# Altium PCB STM32F103C8T6.PcbDoc
Units mm, origin at the board's own origin, x right, y up, seen from the top; angles counter-clockwise.
Board outline 22.86 x 53.34 mm, 2 copper layers (Top Layer, Bottom Layer); 36 components, 51 nets, 172 pads, 50 vias.
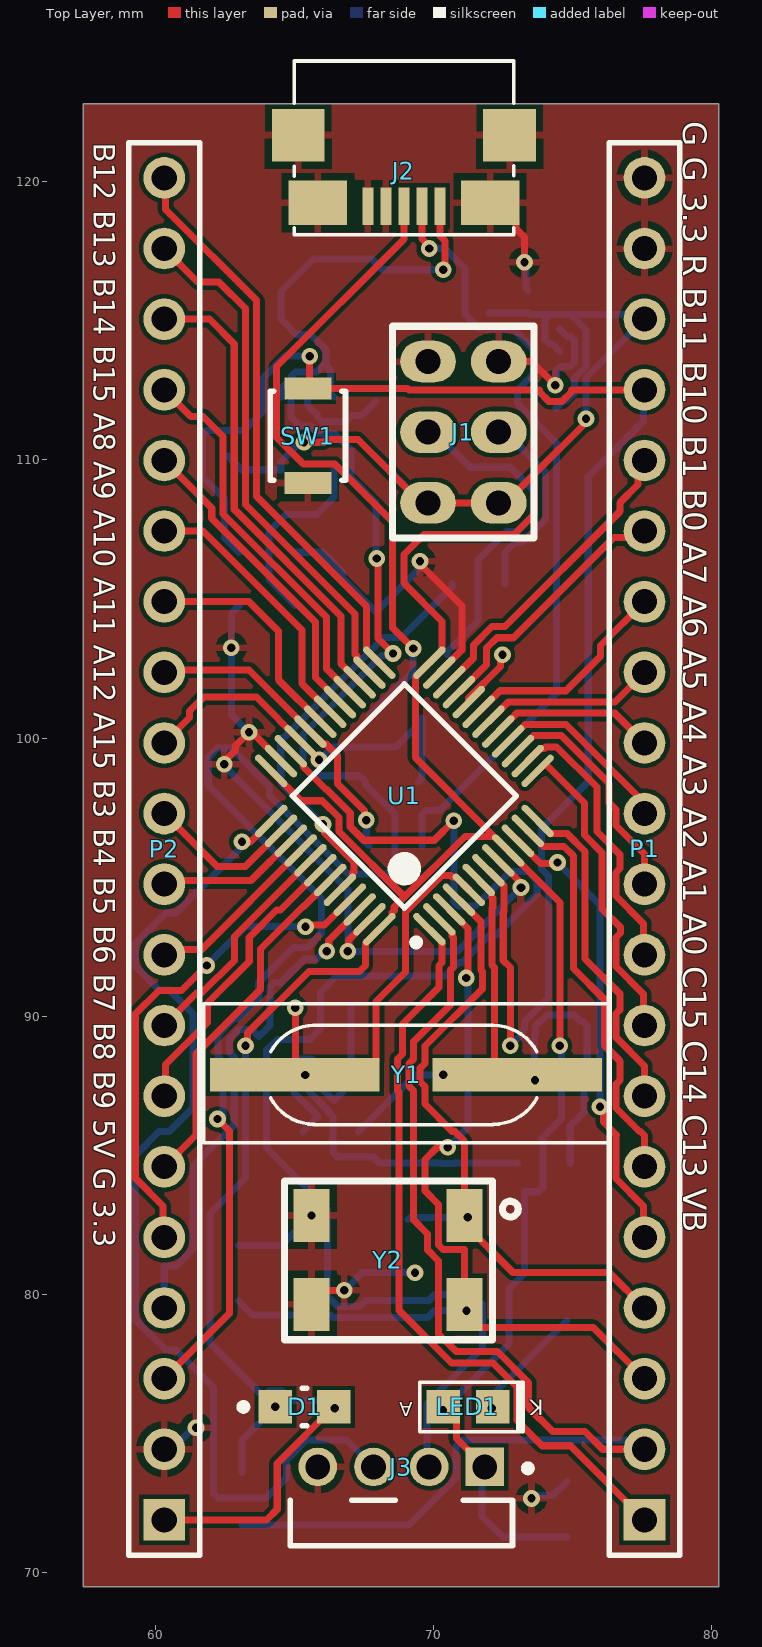
[diagram p0: Top Layer view]
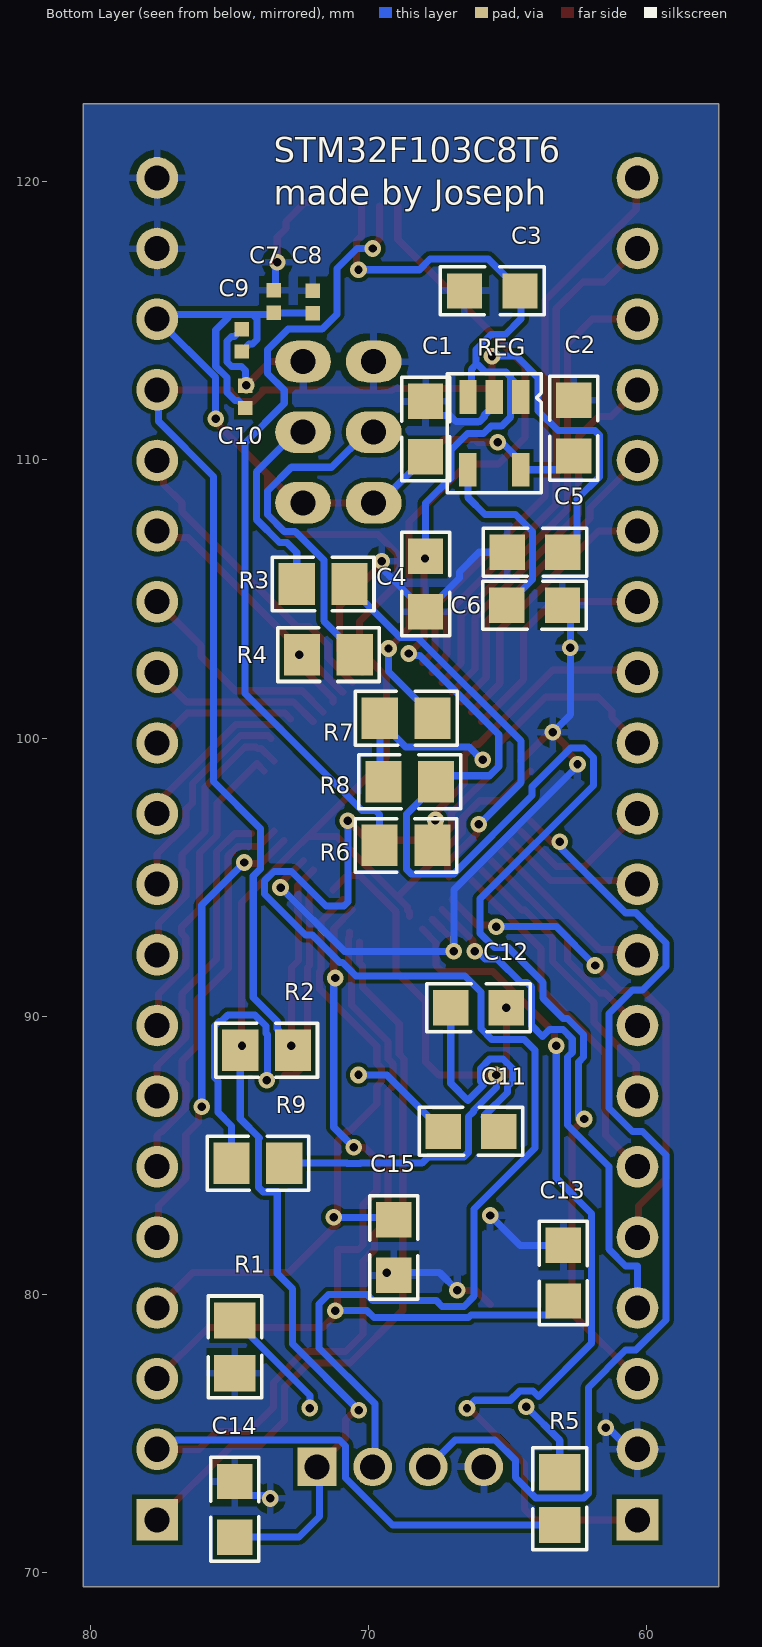
[diagram p1: Bottom Layer view, seen from below]
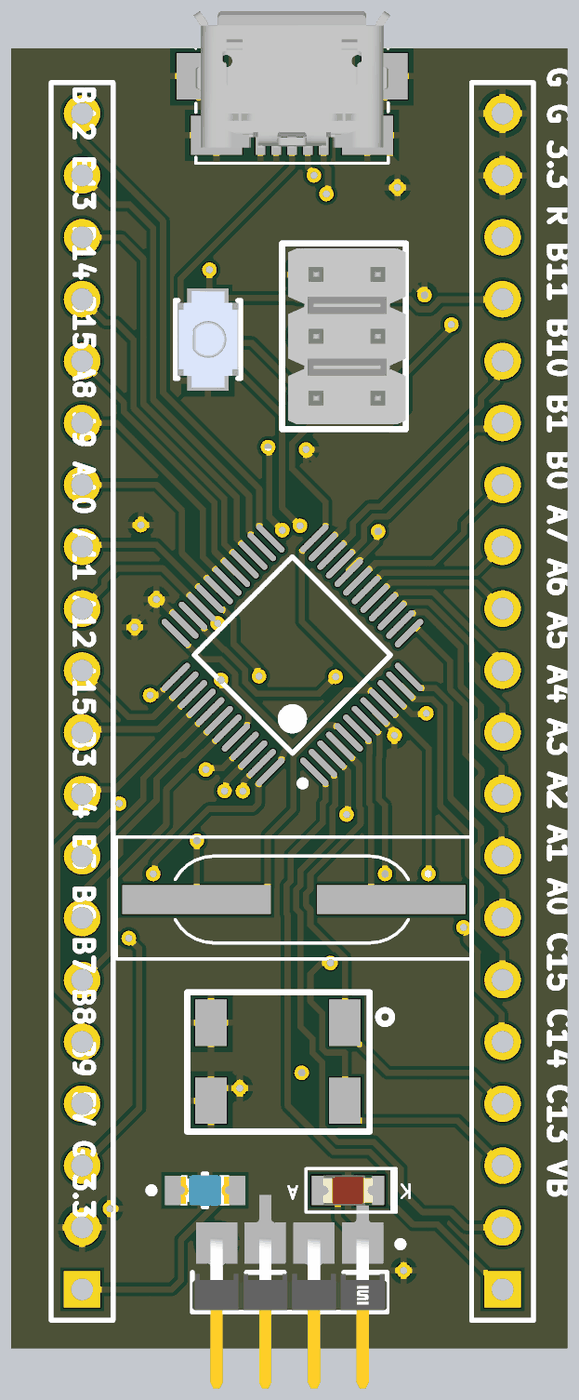
[diagram p2: 3D render of the assembled board from above, using the file's embedded part models]
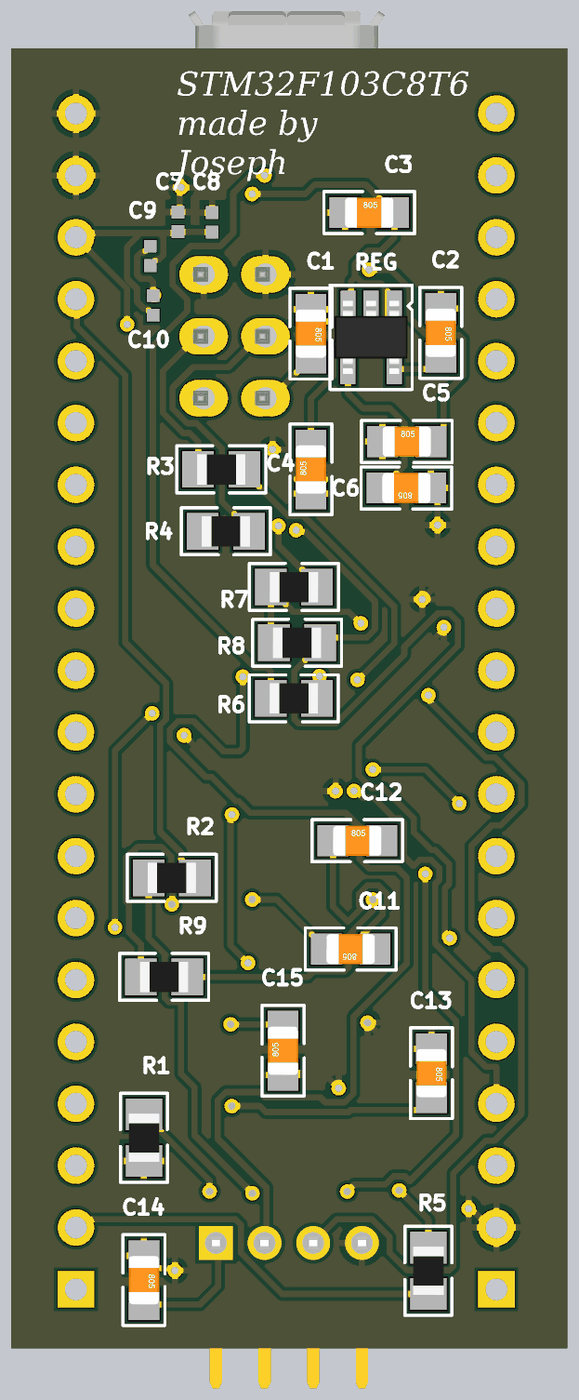
[diagram p3: 3D render of the assembled board from below, using the file's embedded part models]

## Layer stack, top to bottom
Top Solder: solder mask 0.0102, Solder Resist, Dk 3.5
Top Layer: signal copper 0.0356
Dielectric 1: dielectric 0.32, FR-4, Dk 4.8
Bottom Layer: signal copper 0.0356
Bottom Solder: solder mask 0.0102, Solder Resist, Dk 3.5

## Board outline
57.404,69.469 57.404,122.809 80.264,122.809 80.264,69.469

## Design rules (kind name [scope] priority, off if disabled: settings)
Clearance [All] p1: gap=0.15 ignorepadtopadclearanceinfootprint=FALSE
HoleToHoleClearance [All] p1: gap=0 allowstackedmicrovias=TRUE
MinimumSolderMaskSliver [All] p1: minsoldermaskwidth=0
PolygonConnect [All] p1: connectstyle=Relief reliefconductorwidth=0.254 reliefentries=4 polygonreliefangle="90 Angle" airgapwidth=0.254
RoutingVias [All] p1: holewidth=0.3 width=0.6 viastyle="Through Hole" minholewidth=0.25 minwidth=0.55 maxholewidth=0.4 maxwidth=0.8
SilkToSilkClearance [All] p1: silktosilkclearance=0
SilkToSolderMaskClearance [IsPad] p1: minsilkscreentomaskgap=0 clearancetoexposedcopper=TRUE
SolderMaskExpansion [All] p1: expansion=0.05 istentingtop=FALSE
Width Width_4 [All] p1: maxlimit=0.254 minlimit=0.2 preferedwidth=0.254
Width Width_3 [InNet('NetJ2_3')] p2: maxlimit=0.3 minlimit=0.2 preferedwidth=0.254
Width Width_2 [InNet('NetJ2_2')] p3: maxlimit=0.3 minlimit=0.2 preferedwidth=0.254
Width Width_1 [InNet('VCC3.3')] p4: maxlimit=0.6 minlimit=0.254 preferedwidth=0.4
Width [InNet('+5')] p5: maxlimit=0.8 minlimit=0.254 preferedwidth=0.6
26 further rules are at their usual default settings.

## Components (designator, comment, footprint, x,y, rotation, side; value= is the part's Value field where it differs from the comment)
C1 "10uF" CAP_0805 67.945,111.109 r270 bottom
C2 "10uF" CAP_0805 62.611,111.141 r270 bottom
C3 "1uF" CAP_0805 65.548,116.078 r180 bottom
C4 "1uF" CAP_0805 67.945,105.537 r90 bottom
C5 "1uF" CAP_0805 64.008,106.68 r180 bottom
C6 "22pF" CAP_0805 64.024,104.775 r0 bottom
C7 "0.1u" CAPC0402(1005)60_L 72.009,115.678 r270 bottom
C8 "0.1u" CAPC0402(1005)60_L 73.406,115.697 r270 bottom
C9 "0.1u" CAPC0402(1005)60_L 74.549,114.3 r270 bottom
C10 "0.1u" CAPC0402(1005)60_L 74.422,112.268 r270 bottom
C11 "22pF" CAP_0805 66.31,85.852 r0 bottom
C12 "22pF" CAP_0805 66.04,90.297 r180 bottom
C13 "0.1uF" CAP_0805 62.992,80.756 r270 bottom
C14 "0.1uF" CAP_0805 74.803,72.263 r270 bottom
C15 "0.1uF" CAP_0805 69.088,81.677 r90 bottom
D1 "LED BLUE" FP-APHCM2012QBC-D-F01-MFG 65.371,75.946 r0 top
J1 "2X3 Berg Strip" CON6_100_59D78_TH_ST_Duplicate 72.351,108.458 r90 top
J2 "MICRO USB2.0" CON_10118192-0001LF_SMD 68.946,120.401 r180 top
J3 "TMM-104-01-L-S-RA" FP-TMM-104-01-L-S-RA-MFG 68.85,71.768 r0 top
LED1 "RED LED" LED_0805 71.247,75.946 r180 top
P1 "Header 20" HDR1X20 77.597,71.882 r90 top
P2 "Header 20" HDR1X20 60.325,71.882 r90 top
R1 "1.5K" RES_0805 74.803,78.105 r90 bottom
R2 "10K" RES_0805 73.66,88.773 r180 bottom
R3 "100K" RES_0805 71.628,105.537 r180 bottom
R4 "100K" RES_0805 71.44,102.997 r180 bottom
R5 "1.5K" RES_0805 63.119,72.644 r90 bottom
R6 "20" RES_0805 68.646,96.139 r0 bottom
R7 "20" RES_0805 68.641,100.711 r180 bottom
R8 "1.5K" RES_0805 68.514,98.425 r180 bottom
R9 "10Mohm" RES_0805 73.975,84.709 r180 bottom
REG "RT9193-33GB" SOT23-5 65.474,110.958 r0 bottom (schematic designator REG1)
SW1 "B3U-1000P" FP-B3U-1000P-MFG 65.493,110.871 r90 top
U1 "STM32F103C8T6" STM-LQFP48_L 68.961,97.917 r135 top
Y1 "8MHz" XTAL_314_240X47_SMD 65.025,87.884 r0 top
Y2 "32.768KHz" "XTAL_MC-405 32.7680K-G3" 71.12,79.629 r180 top

## Footprints (in the part's own frame and the unit in brackets; to place one, negate y for a bottom-side part, rotate by r counter-clockwise, add the part's x,y. Pads: shape width x height; smd on the part's side, far side on the other; paste and mask are expansions set on the pad)
CAP_0805 [mm] "Ceramic Capacitor"
  rect 1.27x1.27 smd mask+0.076: 1(-1,0) 2(1,0)
  silkscreen extent -1.86,-0.86 1.86,0.86, body extent -1,-0.62 1,0.63, height 0.78
CAPC0402(1005)60_L [mm] "Chip Capacitor, Body 1.0x0.5mm, Height 0.6mm, IPC High Density"
  rect 0.52x0.52 smd: 1(-0.4,0) 2(0.4,0)
  body extent -0.55,-0.3 0.55,0.3, height 0.6
CON6_100_59D78_TH_ST_Duplicate [mm] "Berg strip"
  oval 1.5x2 hole 0.9: 1(0,0) 2(0,2.54) 3(2.54,0) 4(2.54,2.54) 5(5.08,0) 6(5.08,2.54)
  silkscreen extent -1.27,-1.27 6.35,3.81, body extent -1.07,-1.27 6.15,3.56, height 8.18
CON_10118192-0001LF_SMD [mm] "USB2.0 MICRO"
  rect 0.4x1.35 smd: 1(-1.3,1.275) 2(-0.65,1.275) 3(0,1.275) 4(0.65,1.275) 5(1.3,1.275)
  rect 2.1x1.6 smd: 6(-3.1,1.15) 7(3.1,1.15)
  rect 1.9x1.9 smd: 8(-3.8,-1.275) 9(3.8,-1.275)
  silkscreen extent -3.95,-3.94 3.95,2.3, body extent -4.04,-3.94 4.04,1.66, height 2.81
FP-APHCM2012QBC-D-F01-MFG [mm]
  rect 1.2x1.2 smd paste+0 mask+0: 1(-1.05,0) 2(1.05,0)
  silkscreen extent -2.32,-0.67 0.08,0.67, body extent -1.75,-0.77 1.75,0.77, height 0.25
FP-B3U-1000P-MFG [mm]
  rect 0.8x1.7 smd paste+0 mask+0: 1(-1.7,0) 2(1.7,0)
  silkscreen extent -1.6,-1.35 1.6,1.35, body extent -2.2,-1.45 2.2,1.45, height 0.25
FP-TMM-104-01-L-S-RA-MFG [mm]
  rect 1.39x1.39 hole 0.89 paste-1000 mask+0: 1(3,2.019)
  round 1.39 hole 0.89 paste-1000 mask+0: 2(1,2.019) 3(-1,2.019) 4(-3,2.019)
  silkscreen extent -4,-0.81 4.68,2.09, body extent -4.1,-4.24 4.1,4.09, height 0.25
HDR1X20 [mm] "Connector; Header; 20 Position"
  rect 1.5x1.5 hole 0.9: 1(0,0)
  round 1.5 hole 0.9: 2(2.54,0) 3(5.08,0) 4(7.62,0) 5(10.16,0) 6(12.7,0) 7(15.24,0) 8(17.78,0) 9(20.32,0) 10(22.86,0) 11(25.4,0) 12(27.94,0) 13(30.48,0) 14(33.02,0) 15(35.56,0) 16(38.1,0) 17(40.64,0) 18(43.18,0) 19(45.72,0) 20(48.26,0)
  silkscreen extent -1.27,-1.27 49.53,1.27
LED_0805 [mm] "LED"
  rect 1.2x1.2 smd mask+0.076: A(0.889,0) K(-0.889,0)
  silkscreen extent -1.99,-0.89 1.73,0.89, body extent -1.01,-0.62 1.01,0.63, height 1.1
RES_0805 [mm] "Resister"
  rect 1.3x1.5 smd mask+0.076: 1(0.95,0) 2(-0.95,0)
  silkscreen extent -1.83,-0.97 1.83,0.97, body extent -1,-0.63 1,0.62, height 0.5
SOT23-5 [mm] "CASE: SOT"
  rect 0.62x1.22 smd mask+0.076: 1(-0.953,-1.31) 2(-0.003,-1.31) 3(0.947,-1.31) 4(0.952,1.31) 5(-0.953,1.31)
  silkscreen extent -1.69,-2.14 1.69,2.14, body extent -1.5,-1.5 1.5,1.5, height 1.41
STM-LQFP48_L [mm] "QFP, 48-Leads, Body 7x7mm, Pitch 0.5mm, IPC High Density"
  oval 1.55x0.25 smd: 1(-4.025,2.75) 2(-4.025,2.25) 3(-4.025,1.75) 4(-4.025,1.25) 5(-4.025,0.75) 6(-4.025,0.25) 7(-4.025,-0.25) 8(-4.025,-0.75) 9(-4.025,-1.25) 10(-4.025,-1.75) 11(-4.025,-2.25) 12(-4.025,-2.75) 25(4.025,-2.75) 26(4.025,-2.25) 27(4.025,-1.75) 28(4.025,-1.25) 29(4.025,-0.75) 30(4.025,-0.25) 31(4.025,0.25) 32(4.025,0.75) 33(4.025,1.25) 34(4.025,1.75) 35(4.025,2.25) 36(4.025,2.75)
  oval 0.25x1.55 smd: 13(-2.75,-4.025) 14(-2.25,-4.025) 15(-1.75,-4.025) 16(-1.25,-4.025) 17(-0.75,-4.025) 18(-0.25,-4.025) 19(0.25,-4.025) 20(0.75,-4.025) 21(1.25,-4.025) 22(1.75,-4.025) 23(2.25,-4.025) 24(2.75,-4.025) 37(2.75,4.025) 38(2.25,4.025) 39(1.75,4.025) 40(1.25,4.025) 41(0.75,4.025) 42(0.25,4.025) 43(-0.25,4.025) 44(-0.75,4.025) 45(-1.25,4.025) 46(-1.75,4.025) 47(-2.25,4.025) 48(-2.75,4.025)
  silkscreen extent -4.15,-2.85 2.85,3.55, body extent -3.5,-3.5 3.5,3.5, height 1.6
XTAL_314_240X47_SMD [mm] "CASE: TH"
  rect 6.096x1.2 smd: 1(0,0) 2(8,0)
  silkscreen extent -3.29,-2.44 11.32,2.57, body extent -2.99,-2.27 10.9,2.41, height 3.05
"XTAL_MC-405 32.7680K-G3" [mm] "Crystal"
  rect 1.3x1.9 smd: 1(0,-3.2) 2(5.5,-3.2) 3(5.5,0) 4(0,0)
  silkscreen extent -1.93,-4.44 6.48,1.27, body extent -1.02,-4.44 6.48,1.27, height 3.6

## Part data
C1 C2 C3 C4 C5: library part CAP_1uF-50V-5%-0805, "1µF ±5% 50V Ceramic Capacitor X7R 0805 (2012 Metric)", Case/Package="0805 (2012 Metric)", Manufacturer=Yageo, Manufacturing Part Number=CC0805JKX7R9BB105, Supplier Part Number-1=311-3498-1-ND, Supplier-1=Digikey
C6 C11 C12: library part CAP_22pF-50V-5%-0805, "22pF ±5% 50V Ceramic Capacitor C0G, NP0 0805 (2012 Metric)", Case/Package=0805, Manufacturer=KEMET, Manufacturer Part Number=C0805C220J5GACTU, Supplier Part Number-1=399-1113-1-ND, Supplier-1=Digikey
C7 C8 C9 C10: library part CMP-1034-02112-1, "CAP 1uF 4V ±20% 0402 (1005 Metric) Thickness 0.6mm SMD", Case-EIA=0402, Case-Metric=1005, Rated Voltage="4 V", Tolerance=Â±20%, Max Thickness="0.6 mm", Technology=SMT
C13 C14 C15: library part CAP_0.1uF-50V-5%-0805, "0.1µF ±5% 50V Ceramic Capacitor X7R 0805 (2012 Metric)", Case/Package="0805 (2012 Metric)", Manufacturer=KEMET, Manufacturing Part Number=C0805C104J5RACTU, Supplier Part Number-1=399-1171-1-ND, Supplier-1=Digikey
D1: library part CMP-44529-000061-1, "LED BLUE CLEAR CHIP SMD", Case Code (Imperial)=0805, Case Code (Metric)=2012, Color=Blue, Forward Current=20mA, Forward Voltage=3.3V, Lens Color=Colorless, Max Operating Temperature=85°C, Min Operating Temperature=-40°C, Package Quantity=2000, Case/Package=0805, Dominant Wavelength=465nm, Height=0.4mm, Illumination Color=Blue, Lead Free="Lead Free", Length=2mm, Lens Style=Clear, Lens Transparency=Clear, Luminous Intensity=100mcd, Mount="Surface Mount", Number of LEDs=1, Number of Pins=2, Packaging="Tape and Reel", RoHS Compliant=Yes, Series=-, Test Current=20mA, Viewing Angle=110°, Width=1.25mm
J1: library part CON-BS-PLG_2X3-100-TH-ST, "6 pin, 2 row, 2.54mm pitch bergstrip", Case/Package=TH, Manufacturer=NA, Manufacturer Part Number=NA, Supplier Part Number-1=NA, Supplier-1=NA
J2: library part CON-USB_10118192-0002LF-SMD, "USB - micro B USB 2.0 Receptacle Connector 5 Position Surface Mount, Right Angle", Case/Package=SMD, Manufacturer="Amphenol ICC (FCI)", Manufacturing Part Number=10118192-0002LF, Supplier Part Number-1=609-5379-1-ND, Supplier-1=Digikey
J3: library part CMP-02766-001710-1, "CONN HEADER R/A 4POS 2MM", Housing Color=Black, Max Current Rating=3.9A, Max Operating Temperature=125°C, Max Voltage Rating (AC)=500V, Min Operating Temperature=-55°C, Contact Material=Bronze, Contact Plating=Gold, Depth=5.97mm, Gender=Male, Housing Material=Polymer, Lead Free="Lead Free", Length=8mm, Number of Contacts=4, Number of Rows=1, Orientation="Right Angle", Packaging=Bulk, Pitch=2mm, Radiation Hardening=No, REACH SVHC="No SVHC", RoHS Compliant=Yes, Termination=Solder
LED1: library part LED-RED_10mA-0805, "Red 621nm LED Indication - Discrete 2V 0805 (2012 Metric)", Case/ Package=0805, Manufacturer="Lite-On Inc.", Manufacturer Part Number=LTST-C170EKT, Supplier Part Number-1=160-1178-1-ND, Supplier-1=Digikey
P1 P2: "Header, 20-Pin", LatestRevisionDate=17-Jul-2002, LatestRevisionNote="Re-released for DXP Platform.", Publisher="Altium Limited"
R1 R5 R6 R7 R8: library part RES_1.5K-0.125W-1%-0805, "1.5 kOhms ±1% 0.125W, 1/8W Chip Resistor 0805 (2012 Metric) Thick Film", Case/Package=0805, Manufacturer="TE Connectivity Passive Product", Manufacturing Part Number=CRG0805F1K5, Supplier Part Number-1=A106057CT-ND, Supplier-1=Digikey
R2 R3 R4: library part RES_10K-0.125W-1%-0805, "10 kOhms ±1% 0.125W, 1/8W Chip Resistor 0805 (2012 Metric) Moisture Resistant Thick Film", Case/Package=0805, Manufacturer=Yageo, Manufacturing Part Number=RC0805FR-0710KL, Supplier Part Number-1=311-10.0KCRCT-ND, Supplier-1=Digikey
R9: library part RES_10MOHM-0.125W-1%-0805, "10 MOhms ±1% 0.125W, 1/8W Chip Resistor 0805 (2012 Metric) Automotive AEC-Q200, High Voltage Thick Film", Case/Package="0805 (2012 Metric)", Manufacturer="Rohm Semiconductor", Manufacturing Part Number=KTR10EZPF1005, Supplier Part Number-1=RHM10.0MAHCT-ND, Supplier-1=Digikey
REG: library part REG_3.3V-5.5V-0.3A-SOT-23-5, "Linear Voltage Regulator IC 1 Output 300mA SOT-23-5", Case/ Package=SOT-23-5, Manufacturer="Richtek USA Inc.", Supplier Part Number-1=1028-1014-1-ND, Manufacturer Part Number=RT9193-33GB, Supplier-1=Digikey
SW1: library part CMP-2100-03586-2, "SWITCH TACTILE SPST-NO 0.05A 12V", Contact Current Rating=50mA, Contact Resistance=100mR, Insulation Resistance=100MR, Max Operating Temperature=70°C, Max Voltage Rating (DC)=12V, Min Operating Temperature=-25°C, Operating Force=1.5N, Package Quantity=1, Ratings="Dust Proof", Actuator Length=0.4mm, Actuator Type=Standard, Contact Material=Silver, Current Rating=50mA, Depth=2.5mm, Electrical Life=200000Cycles, Height=1.2mm, Illumination Type=Non-Illuminated, Lead Free="Lead Free", Length=4mm, Max Current Rating=50mA, Mechanical Life=200000Cycles, Mount="Surface Mount", Orientation=Straight, Packaging="Tape and Reel", Switch Function=Off-Mom, Switch Travel=0.15mm, Termination=SMD/SMT, Throw Configuration=SPST, Voltage Rating (DC)=12V, Weight=0.000776oz, Width=3mm
U1: library part CMP-0237-00215-3, "ARM Cortex-M3 32-bit MCU, 64 KB Flash, 20 KB Internal RAM, 37 I/Os, 48-pin LQFP, -40 to 85 degC, Tray", I/Os (High Current)=37, Operating Frequency(F) (Processor speed) (MHz)=72, Supply Voltage(Vcc) min (V)=2, A/D Converter="2x12-bit (10 Channel)", ComponentLink1Description="Manufacturer URL", ComponentLink1URL=http://www.st.com/web/en/home.html, ComponentLink2Description=Datasheet, ComponentLink2URL=http://www.st.com/st-web-ui/static/active/en/resource/technical/document/datasheet/CD00161566.pdf, ComponentLink3Description="Package Specification", ComponentLink3URL=http://www.st.com/st-web-ui/static/active/en/resource/technical/document/datasheet/DM00058181.pdf, Core="ARM Cortex-M3", DatasheetVersion="Rev. 16", FLASH Size (Prog) (kB)=64, Internal RAM Size (kB)=20, Mounting Technology="Surface Mount", PackageDescription="48-Pin Low Profile Quad Flat Package, 7 x 7 mm Body, 0.5 mm Pitch", PackageReference=LQFP48, PackageVersion="Rev. 6, 06/2013", Packing=Tray, PartNumber=STM32F103C8T6
Y1: library part XTAL_8MHZ-LFXTAL030234, "Crystals 8MHz 22pF -20C 70C", Case/Package=SMD, Manufacturer="IQD Frequency Products", Manufacturing Part Number=LFXTAL030234Reel, Supplier Part Number-1=449-LFXTAL030234REEL, Supplier-1=Mouser
Y2: library part "XTAL_32.768KHz-MC-405 32.7680K-G3", "Crystals SMD AT XTL MHZ +/-50PPM 12.5 PF 250 T/R", Case/Package=SMD, Manufacturer=Epson, Manufacturing Part Number="MC-405 32.7680K-G3: ROHS", Supplier Part Number-1=732-MC405327680KG3RS, Supplier-1=Mouser

## Via types
v1: diameter 0.6, hole 0.3, Top Layer to Bottom Layer, 50 vias

## Nets (pads, with @x,y where several pads share a name; then routed paths per layer and width w, separated by ;. In a path a pad name is that pad's centre, name@x,y a point inside that pad or via, vN(x,y) a via of type N, cw(c..) or ccw(c..) an arc to the next point about the centre after c; other vN are vias at no path point)
+5: C3.2 C4.2 J2.1 P2.3 R8.1 REG.1 REG.3 | length 76
  Top Layer w0.254: P2.3 62.674,79.311 62.674,85.869 62.669,85.869 v1(62.241,86.298) ; v1(67.964,106.453) 68.007,106.41 68.007,103.584 v1(68.55,103.04) ; J2.1 70.246,118.061 70.427,117.88 70.427,117.003 70.358,116.934 v1(70.358,116.84)
  Bottom Layer w0.254: v1(62.241,86.298) 62.438,86.298 62.438,88.355 62.265,88.528 62.265,89.34 62.84,89.915 62.996,89.915 63.724,90.643 63.724,91.214 64.973,92.463 65.466,92.463 65.982,92.979 65.982,94.219 61.907,98.294 61.907,99.299 62.245,99.637 62.723,99.637 64.112,98.248 64.112,97.931 66.931,95.112 68.461,95.112 68.623,95.274 68.623,97.266 67.564,98.325 R8.1 67.347,98.642 65.652,98.642 65.314,98.98 65.314,100.126 68.162,102.974 68.484,102.974 v1(68.55,103.04) ; REG.1 64.521,112.568 64.884,112.931 64.884,112.992 65.046,113.155 65.795,113.155 66.051,113.411 66.145,113.411 66.297,113.259 66.297,112.392 REG.3 ; 64.884,112.931 64.884,111.543 65.214,111.214 65.592,111.214 65.858,110.948 66.438,110.948 67.033,110.353 67.033,109.359 67.945,108.447 C4.2 ; 66.056,113.416 66.133,113.493 66.133,113.971 65.588,114.516 65.067,114.516 64.521,115.062 64.521,116.051 65.691,117.221 67.787,117.221 68.168,116.84 v1(70.358,116.84)
GND: C1.1 C2.1 C3.1 C4.1 C5.1 C6.1 C7.1 C8.1 C9.1 C10.1 C13.1 C14.1 C15.1 J1.5 J1.6 J2.4 J2.5 J2.6 J2.7 J2.8 J2.9 J3.4 P1.19 P1.20 P2.2 R1.2 REG.2 SW1.1 U1.8 U1.23 U1.35 U1.47 Y2.2 Y2.3 | length 60.6
  Top Layer w0.254: v1(62.484,99.06) 62.484,99.154 62.891,99.561 62.891,99.721 v1(63.373,100.203) 63.439,100.137 63.559,100.137 U1.35 ; Y2.3 66.128,80.137 v1(66.802,80.137) ; v1(66.929,92.329) 66.96,92.36 66.96,92.734 U1.47 ; v1(69.522,106.354) 69.522,106.253 71.034,104.741 71.034,103.172 U1.23 ; J2.6 72.296,119.251 72.969,118.578 72.969,118.328 73.278,118.019 v1(73.278,117.104) ; U1.8 73.151,94.787 v1(73.151,94.625) ; J1.5 73.538,113.538 v1(74.391,112.685)
  Bottom Layer w0.254: P2.2 60.602,74.422 61.374,75.194 v1(61.467,75.194) ; v1(62.484,99.06) 62.484,98.988 66.929,94.543 v1(66.929,92.329) 70.865,92.329 v1(73.161,94.625) ; C13.1 64.547,81.756 v1(65.62,82.829) ; C6.1 62.738,104.489 v1(62.738,103.251) 62.738,100.838 v1(63.373,100.203) ; C5.1 66.024,106.68 66.73,105.973 66.73,105.752 C4.1 69.456,106.048 69.456,106.288 v1(69.522,106.354) ; REG.2 65.471,111.968 65.834,111.605 65.834,111.543 65.996,111.381 66.846,111.381 67.066,111.601 67.437,111.601 C1.1 ; v1(66.802,80.137) 67.437,80.772 v1(69.342,80.772) ; v1(73.278,117.104) 73.342,117.04 73.342,116.161 C8.1 ; v1(73.532,72.654) 73.626,72.654 73.727,72.755 74.295,72.755 C14.1 ; C10.1 74.422,113.214 74.571,113.363 74.924,113.363 75.086,113.525 75.086,114.275 74.924,114.437 74.812,114.437 C9.1
  other v1: 73.152,94.615
NetC5_2: C5.2 P1.17 R2.1 SW1.2 U1.7 | length 56.7
  Top Layer w0.254: v1(65.556,113.732) 65.556,112.634 SW1.2 69.076,112.571 69.136,112.511 73.814,112.511 73.814,112.446 74.152,112.108 74.63,112.108 74.968,112.446 74.968,112.511 77.586,112.511 P1.17 ; U1.7 71.984,95.245 72.542,94.686 72.542,93.747 72.517,93.722 72.517,91.997 72.771,91.743 v1(72.771,88.934)
  Bottom Layer w0.254: C5.2 62.5,107.188 62.5,108.59 61.699,109.391 61.699,110.891 61.861,111.053 63.185,111.053 63.896,111.764 63.896,112.954 64.673,113.732 v1(65.556,113.732) ; v1(72.771,88.934) 73.233,89.396 73.233,89.499 73.279,89.545 73.279,89.805 74.142,90.668 74.142,95.032 73.888,95.286 73.888,96.748 75.573,98.433 75.573,109.41 77.554,111.391 77.554,112.479 P1.17
NetC6_2: C6.2 REG.4 | length 6.9
  Bottom Layer w0.254: C6.2 64.096,105.703 64.096,107.43 64.71,108.043 65.812,108.043 66.426,108.657 REG.4
NetC11_1: C11.1 C12.1 | length 9.4
  Bottom Layer w0.254: C11.1 65.834,86.376 65.818,86.392 65.818,86.434 64.995,87.258 64.995,87.47 64.822,87.643 64.822,88.121 65.16,88.459 65.638,88.459 65.976,88.121 65.976,87.643 65.864,87.531 66.427,86.969 67.04,87.582 C12.1
NetC11_2: C11.2 R9.2 U1.6 Y1.2 | length 20.5
  Top Layer w0.254: U1.6@72.087,94.434 72.087,94.299 72.138,94.247 72.138,93.914 72.113,93.889 72.113,91.829 72.194,91.748 72.194,88.357 72.667,87.884 Y1.2
  Bottom Layer w0.254: C11.2 69.342,87.884 v1(70.358,87.884) ; v1(73.66,87.688) 73.66,87.757 73.573,87.844 73.637,87.908 73.637,89.332 73.683,89.378 73.683,89.638 74.088,90.043 75.057,90.043 75.3,89.8 75.375,89.8 75.537,89.638 75.537,87.791 75.416,87.67 75.416,86.542 74.925,86.051 R9.2
NetC12_2: C12.2 R9.1 U1.5 Y1.1 | length 24.4
  Top Layer w0.254: Y1.1 67.473,87.884 67.946,88.357 67.946,90.527 69.001,91.582 69.001,93.752 70.297,95.049 70.63,95.049 70.681,94.997 70.82,94.997 U1.5 ; Y1.1@65.04,87.899 v1(65.04,90.297)
  Bottom Layer w0.254: v1(65.399,87.882) 65.399,87.425 66.222,86.602 66.222,86.559 66.398,86.383 66.398,85.102 66.56,84.94 67.841,84.94 68.072,84.709 70.281,84.709 70.287,84.703 70.765,84.703 70.771,84.709 R9.1
NetC13_2: C13.2 P1.3 U1.3 Y2.4 | length 32.4
  Top Layer w0.254: v1(70.526,85.28) 70.144,85.28 69.7,84.836 69.7,83.716 70.193,83.223 70.193,81.764 70.355,81.602 71.12,81.602 Y2.4 ; U1.3 70.57,93.831 71.247,93.153 71.247,91.428 v1(71.189,91.37) ; Y2.4@71.121,79.328 71.643,78.806 75.753,78.806 P1.3
  Bottom Layer w0.254: C13.2 63.5,79.248 66.304,79.248 66.396,79.156 69.8,79.156 70.048,79.404 v1(71.197,79.404) ; v1(70.526,85.28) 71.247,86.001 71.247,91.312 v1(71.189,91.37)
NetC15_2: C15.2 P1.4 U1.4 Y2.1 | length 23.3
  Top Layer w0.254: U1.4@70.923,94.187 71.709,93.401 71.709,91.662 71.766,91.605 71.766,90.984 69.7,88.918 69.7,88.296 69.527,88.123 69.527,87.645 69.7,87.472 69.7,86.835 70.678,85.857 70.765,85.857 71.103,85.519 71.103,85.432 71.12,85.415 Y2.1 ; Y2.1@71.12,82.529 72.877,80.772 76.327,80.772 P1.4
  Bottom Layer w0.254: C15.2 69.173,82.762 v1(71.244,82.762)
NetD1_1: D1.1 R5.1 | length 2.8
  Bottom Layer w0.254: R5.1 63.119,74.744 v1(64.321,75.946)
NetJ1_3: J1.3 R3.2 | length 7.1
  Bottom Layer w0.254: J1.3 72.601,110.998 74.032,109.567 74.032,107.865 73.194,107.027 72.937,107.027 72.578,106.668 R3.2
NetJ1_4: J1.4 R4.1 | length 12.1
  Bottom Layer w0.254: J1.4 70.061,110.998 71.322,109.737 72.774,109.737 73.628,108.883 73.628,108.033 73.026,107.431 72.634,107.431 71.605,106.402 71.605,104.212 70.49,103.097 R4.1
NetJ2_2: J2.2 R6.1 | length 28.8
  Top Layer w0.254: J2.2 69.596,117.95 69.85,117.696 v1(69.85,117.602)
  Bottom Layer w0.254: R6.1 69.596,97.249 69.745,97.398 70.229,97.398 74.436,101.605 74.436,110.615 73.026,112.025 73.026,112.511 73.628,113.113 73.628,113.963 72.89,114.702 71.673,114.702 71.135,115.24 71.135,116.879 70.412,117.602 v1(69.85,117.602)
NetJ2_3: J2.3 R7.1 | length 23.7
  Top Layer w0.254: J2.3 68.946,117.938 64.366,113.358 64.366,110.808 65.326,109.848 66.458,109.848 68.541,107.765 68.541,103.958 v1(69.278,103.221)
  Bottom Layer w0.254: R7.1 67.691,100.811 69.278,102.398 v1(69.278,103.221)
NetJ3_2: J3.2 U1.34 | length 49.6
  Top Layer w0.254: U1.34@65.334,99.066 65.334,98.96 66.147,98.147 66.172,98.147 67.014,97.304 67.014,96.809 67.499,96.324 70.035,96.324 v1(70.739,97.028)
  Bottom Layer w0.254: J3.2 69.77,73.867 69.77,76.064 71.774,78.068 71.774,79.643 71.436,79.981 70.054,79.981 69.838,79.765 67.553,79.765 67.348,79.56 66.563,79.56 66.197,79.926 66.197,83.068 64.008,85.257 64.008,88.773 64.395,89.16 65.565,89.16 65.952,89.547 65.952,90.871 66.521,91.44 70.443,91.44 70.928,91.925 71.032,91.925 72.02,92.913 72.266,92.913 73.738,94.385 73.738,94.864 73.4,95.202 72.766,95.202 71.522,93.958 70.888,93.958 70.739,94.107 v1(70.739,97.028)
NetJ3_3: J3.3 U1.37 | length 37.6
  Top Layer w0.254: v1(63.119,96.266) 63.421,96.266 U1.37
  Bottom Layer w0.254: v1(63.119,96.266) 63.053,96.2 63.053,96.017 60.75,93.715 60.386,93.715 59.298,92.627 59.298,91.777 60.143,90.932 60.507,90.932 61.352,90.087 61.352,86.697 60.507,85.852 60.143,85.852 59.298,85.007 59.298,79.077 60.386,77.989 60.75,77.989 62.092,76.647 62.092,72.829 62.254,72.667 63.984,72.667 64.716,73.399 64.716,74.027 65.447,74.759 66.878,74.759 J3.3
NetLED1_K: LED1.K R1.1 | length 4.3
  Bottom Layer w0.254: v1(72.107,75.903) 72.107,76.359 R1.1
NetP1_2: P1.2 R5.2 U1.2 | length 41.8
  Top Layer w0.254: U1.2@70.673,93.02 70.673,92.885 70.724,92.833 70.724,91.763 70.612,91.651 70.612,90.401 69.296,89.085 69.296,88.463 69.123,88.29 69.123,87.478 69.296,87.305 69.296,82.661 69.789,82.168 69.789,81.597 70.188,81.198 70.193,81.198 70.193,78.564 70.824,77.933 72.312,77.933 73.417,76.828 73.417,75.935 74.295,75.057 75.46,75.057 76.095,74.422 P1.2
  Bottom Layer w0.254: R5.2 69.132,71.694 70.822,73.384 70.822,74.541 71.04,74.759 76.923,74.759 77.26,74.422 P1.2
NetP1_5: P1.5 U1.10 | length 16.6
  Top Layer w0.254: U1.10 73.862,95.491 74.431,95.491 v1(74.465,95.525) ; v1(75.993,86.742) 76.117,86.742 76.117,86.189 76.581,85.725 76.57,85.714 76.57,84.157 77.554,83.173 77.554,82.085 P1.5
  Bottom Layer w0.254: v1(74.465,95.525) 75.993,93.997 v1(75.993,86.742)
NetP1_6: P1.6 U1.11 | length 14.4
  Top Layer w0.254: U1.11 73.401,96.662 73.961,96.102 74.704,96.102 75.042,95.764 75.042,91.709 76.166,90.585 76.166,88.934 76.708,88.392 76.708,87.685 76.57,87.547 76.57,86.697 77.415,85.852 77.448,85.852 77.597,85.703 P1.6
NetP1_7: P1.7 U1.12 | length 11.3
  Top Layer w0.254: U1.12@74.211,96.559 74.819,96.559 75.459,95.918 75.459,92.054 76.708,90.805 76.708,90.225 76.57,90.087 76.57,89.237 77.597,88.21 P1.7
NetP1_8: P1.8 U1.13 | length 11.4
  Top Layer w0.254: U1.13 74.016,99.083 74.018,99.083 75.438,97.663 75.438,96.511 76.073,95.876 76.073,93.853 76.73,93.196 76.73,92.986 76.57,92.826 76.57,91.777 77.554,90.793 77.554,89.705 P1.8
NetP1_9: P1.9 U1.14 | length 10.2
  Top Layer w0.254: U1.14 73.855,99.629 73.993,99.629 74.045,99.68 74.437,99.68 75.882,98.234 75.882,96.637 76.708,95.812 76.708,95.305 76.57,95.167 76.57,94.317 77.554,93.333 77.554,92.245 P1.9
NetP1_10: P1.10 U1.15 | length 7.7
  Top Layer w0.254: U1.15@73.504,99.982 73.606,100.084 74.604,100.084 76.327,98.361 76.327,97.663 76.57,97.42 76.57,96.857 77.597,95.83 P1.10
NetP1_11: P1.11 U1.16 | length 6.1
  Top Layer w0.254: U1.16@73.151,100.336 73.303,100.488 74.772,100.488 77.359,97.901 77.359,97.52 P1.11
NetP1_12: P1.12 U1.17 | length 5.3
  Top Layer w0.254: U1.17@72.797,100.69 73,100.892 76.527,100.892 P1.12
NetP1_13: P1.13 U1.18 | length 6.3
  Top Layer w0.254: U1.18 71.987,100.586 72.697,101.296 76.531,101.296 P1.13
NetP1_14: P1.14 U1.19 | length 7.8
  Top Layer w0.254: U1.19 71.633,100.94 72.393,101.7 74.776,101.7 76.017,102.941 76.017,103.322 P1.14
NetP1_15: P1.15 U1.21 | length 9.4
  Top Layer w0.254: U1.21 71.911,102.634 71.911,103.231 72.286,103.606 72.882,103.606 76.48,107.204 77.359,107.204 P1.15
NetP1_16: P1.16 U1.22 | length 11.2
  Top Layer w0.254: U1.22 71.454,102.885 71.454,103.346 72.118,104.01 72.579,104.01 76.708,108.139 76.708,108.458 77.369,109.119 77.369,109.754 P1.16
NetP2_4: P2.4 U1.46 | length 18.9
  Top Layer w0.254: v1(66.174,92.337) 66.24,92.403 66.24,92.721 U1.46
  Bottom Layer w0.254: P2.4 60.325,81.015 60.75,81.015 61.352,81.617 61.352,84.593 62.842,86.083 62.842,88.522 62.669,88.695 62.669,89.173 63.007,89.511 63.485,89.511 63.734,89.261 64.128,89.655 64.128,91.047 64.29,91.209 64.516,91.209 65.366,92.059 65.802,92.059 66.08,92.337 v1(66.174,92.337)
NetP2_5: P2.5 U1.45 | length 17.9
  Top Layer w0.254: P2.5 60.282,82.085 60.282,83.173 59.298,84.157 59.298,90.087 60.132,90.921 60.949,90.921 v1(61.849,91.821) ; v1(65.405,93.218) 65.461,93.274 66.086,93.274 U1.45
  Bottom Layer w0.254: v1(61.849,91.821) 63.246,93.218 v1(65.405,93.218)
NetP2_6: P2.6 U1.43 | length 12.8
  Top Layer w0.254: P2.6 61.468,85.725 61.468,88.646 63.786,90.964 63.786,92.415 65.317,93.946 65.344,93.946 U1.43
NetP2_7: P2.7 U1.42 | length 10.5
  Top Layer w0.254: P2.7 60.368,87.165 60.368,88.253 61.881,89.765 61.881,90.465 63.382,91.967 63.382,92.828 64.364,93.809 64.5,93.809 U1.42
NetP2_8: P2.8 U1.41 | length 8.2
  Top Layer w0.254: P2.8 61.488,90.825 61.669,90.825 62.846,92.002 62.846,92.862 U1.41
NetP2_9: P2.9 U1.40 | length 6.5
  Top Layer w0.254: P2.9 60.521,92.398 61.674,92.398 U1.40
NetP2_10: P2.10 U1.39 | length 5.2
  Top Layer w0.254: P2.10 60.452,94.869 63.438,94.869 U1.39
NetP2_11: P2.11 U1.38 | length 5.5
  Top Layer w0.254: P2.11 62.23,95.377 63.239,95.377 U1.38
NetP2_12: P2.12 R7.2 R8.2 U1.33 | length 13
  Top Layer w0.254: P2.12 61.238,100.735 61.238,100.967 61.744,101.473 63.637,101.473 U1.33
  Bottom Layer w0.254: v1(65.891,99.219) 65.924,99.219 66.389,99.684 68.664,99.684 R7.2@69.591,100.611 ; R8.2 69.591,98.552 R7.2@69.591,100.611 ; R7.2 R7.2@69.591,100.611
NetP2_13: P2.13 R6.2 U1.32 | length 11.4
  Top Layer w0.254: P2.13 60.407,102.444 63.373,102.444 U1.32 65.587,100.233 66.044,99.776 66.15,99.776 66.548,99.378 66.548,98.361 67.525,97.384 67.525,97.114 v1(67.591,97.048)
  Bottom Layer w0.254: v1(67.591,97.048) 67.591,96.552 67.437,96.398 R6.2
NetP2_14: P2.14 U1.31 | length 8.4
  Top Layer w0.254: P2.14 63.373,104.902 64.427,103.848 64.427,102.097 U1.31
NetP2_15: P2.15 U1.30 | length 9.8
  Top Layer w0.254: P2.15 61.722,107.442 65.278,103.886 65.278,101.954 U1.30
NetP2_16: P2.16 U1.29 | length 11.3
  Top Layer w0.254: P2.16 62.034,108.273 62.034,107.892 65.763,104.163 65.763,102.176 U1.29
NetP2_17: P2.17 U1.28 | length 13.9
  Top Layer w0.254: P2.17 61.281,111.566 61.721,111.566 62.438,110.849 62.438,108.06 66.167,104.331 66.167,102.479 U1.28
NetP2_18: P2.18 U1.27 | length 16.9
  Top Layer w0.254: P2.18 61.953,115.062 62.842,114.173 62.842,108.227 66.675,104.394 66.675,102.681 67.352,102.003 U1.27
NetP2_19: P2.19 U1.26 | length 18.8
  Top Layer w0.254: P2.19 61.524,116.403 62.286,116.403 63.246,115.443 63.246,108.394 67.183,104.457 67.183,103.013 67.249,102.947 67.249,102.811 U1.26
NetP2_20: P2.20 U1.25 | length 20.6
  Top Layer w0.254: P2.20 60.368,120.099 60.368,119.011 63.65,115.729 63.65,108.689 67.603,104.736 67.603,103.164 U1.25
NetR3_1: R3.1 U1.44 | length 14.6
  Top Layer w0.254: v1(66.033,96.898) 66.088,96.843 66.088,96.585 67.153,95.52 67.153,95.187 67.102,95.136 U1.44@67.102,95
  Bottom Layer w0.254: v1(66.033,96.898) 66.011,96.898 64.516,98.393 64.516,99.899 68.234,103.617 68.858,103.617 70.678,105.437 R3.1
NetR4_2: R4.2 U1.20 | length 2.2
  Top Layer w0.254: U1.20 71.277,101.429 72.421,102.574 72.421,102.926 v1(72.488,102.992)
VBAT: P1.1 U1.1 | length 26.6
  Top Layer w0.254: U1.1@70.319,92.667 70.319,91.93 70.208,91.818 70.208,91.036 68.892,89.72 68.892,88.631 68.719,88.458 68.719,87.31 68.765,87.264 68.765,79.421 70.657,77.529 72.145,77.529 73.013,76.661 73.013,75.45 73.914,74.549 74.93,74.549 P1.1
VCC3.3: C1.2 C2.2 C7.2 C8.2 C9.2 C10.2 C14.2 D1.2 J1.1 J1.2 J3.1 LED1.A P1.18 P2.1 R2.2 REG.5 U1.9 U1.24 U1.36 U1.48 | length 129
  Top Layer w0.254: P2.1 64.008,71.882 64.389,72.263 64.389,73.914 D1.2@66.414,75.939 ; v1(63.246,88.934) 63.312,89 63.312,89.385 65.53,91.603 67.346,91.603 67.564,91.821 67.564,92.631 U1.48 ; U1.36 65.246,97.743 66.004,97.743 66.61,97.137 66.61,96.635 68.936,94.309 68.936,94.259 ; v1(65.353,110.637) 66.068,110.637 66.161,110.73 67.289,110.73 69.561,108.458 J1.2 J1.1 72.601,108.458 73.628,109.485 ; U1.48@68.516,93.586 68.516,93.722 68.597,93.802 68.597,93.92 68.936,94.259 ; U1.24 69.863,102.705 69.354,102.197 69.354,99.291 72.182,96.464 U1.9 74.56,94.086 74.56,88.945 v1(74.549,88.934) ; U1.24@70.319,103.167 70.319,104.193 68.945,105.568 68.945,106.593 69.664,107.313 72.908,107.313 73.628,108.033 73.628,109.485 ; LED1.A@70.413,75.891 70.831,75.473 70.831,74.806 J3.1 ; U1.9@72.18,96.463 71.14,96.463 68.936,94.259 ; v1(75.493,111.484) 75.493,111.35 73.628,109.485
  Bottom Layer w0.254: C2.2 63.104,109.648 REG.5 64.521,109.948 65.143,110.57 65.287,110.57 v1(65.353,110.637) ; v1(63.246,88.934) 63.246,84.171 61.976,82.901 61.976,78.232 63.884,76.325 64.082,76.523 64.56,76.523 64.898,76.185 66.168,76.185 v1(66.454,75.898) ; C1.2 69.596,108.458 J1.2 ; v1(70.347,75.825) 72.723,78.201 72.723,80.185 73.279,80.74 73.279,83.682 73.79,83.682 73.952,83.844 73.952,85.574 73.914,85.611 74.61,86.307 R2.2 ; J3.1 71.755,73.692 71.755,72.009 72.501,71.263 C14.2 ; C7.2 72.018,115.287 73.397,115.287 C8.2 73.466,115.237 74.174,115.237 ; C10.2 74.685,112.131 74.797,112.131 75.086,112.42 75.086,112.956 75.089,112.959 75.091,112.959 75.49,113.358 75.49,114.671 75.057,115.104 75.057,115.237 ; C9.2 74.286,114.163 74.174,114.163 74.012,114.325 74.012,115.075 74.174,115.237 ; v1(75.493,111.484) 75.493,112.958 P1.18 77.422,115.237 75.057,115.237 ; 74.174,115.237 75.057,115.237

## Polygon pours and split planes (outlines as drawn)
GND on Top Layer "GND_L01_P000" (solid, pour order 0): 57.404,69.469 80.264,69.469 80.264,122.809 57.404,122.809
GND on Bottom Layer "GND_L02_P002" (solid, pour order 2): 80.264,69.469 57.404,69.469 57.404,122.809 80.264,122.809

## Silkscreen, mask and mechanical layers (free items; w line width, h text height)
Top Overlay:
  text "G G 3.3 R B11 B10 B1 B0 A7 A6 A5 A4 A3 A2 A1 A0 C15 C14 C13 VB" at 78.994,122.174 h0.85 r270
  text "B12 B13 B14 B15 A8 A9 A10 A11 A12 A15 B3 B4 B5 B6 B7 B8 B9 5V G 3.3" at 57.785,121.412 h0.78 r270
Bottom Overlay:
  text "STM32F103C8T6  / made by Joseph" at 73.406,118.872 h1.52

## Text inside footprints (layer, text, board x,y; h text height)
LED1: Top Overlay "A" at 69.26,76.121 h0.51 r180; Top Overlay "K" at 73.972,76.196 h0.56 r180